# Altium PCB PCB.PcbDoc
Units mil, origin at the board's own origin, x right, y up, seen from the top; angles counter-clockwise.
Board outline 1335 x 530 mil, 2 copper layers (Top Layer, Bottom Layer); 33 components, 28 nets, 127 pads, 63 vias.
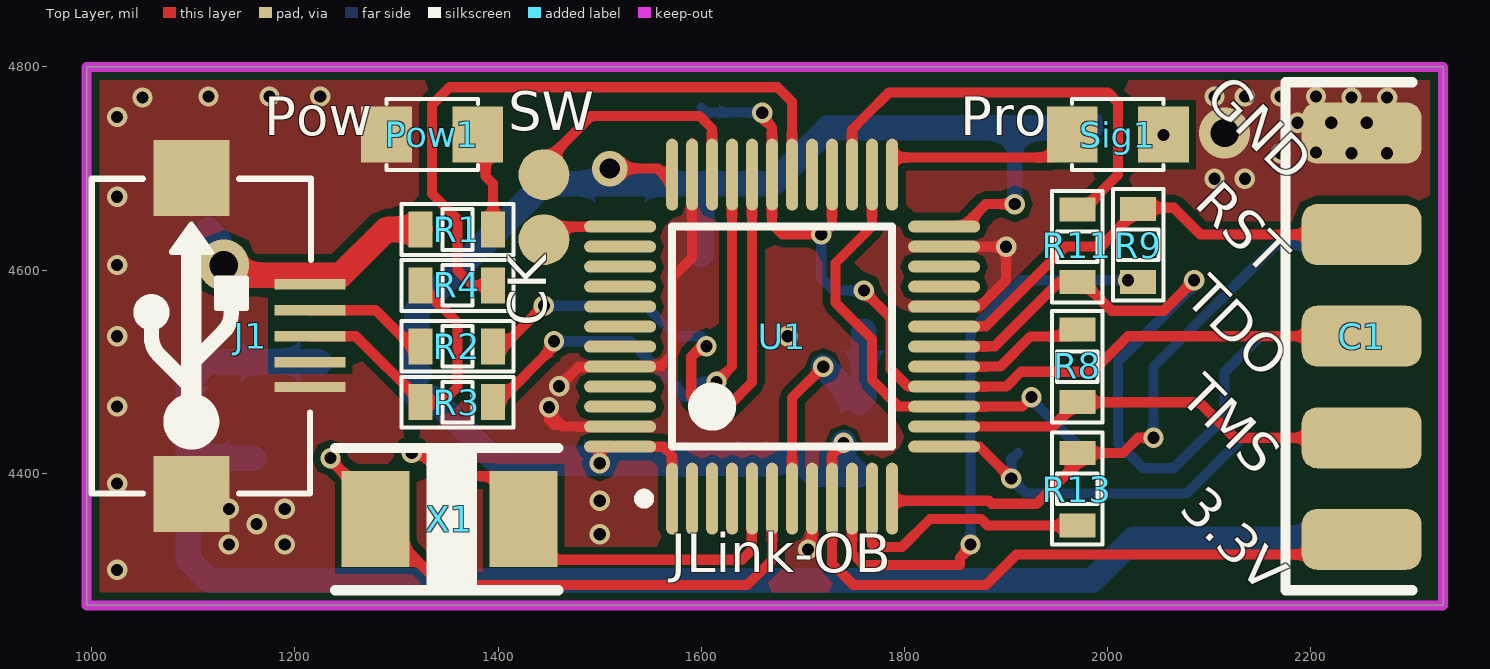
[diagram p0: Top Layer view]
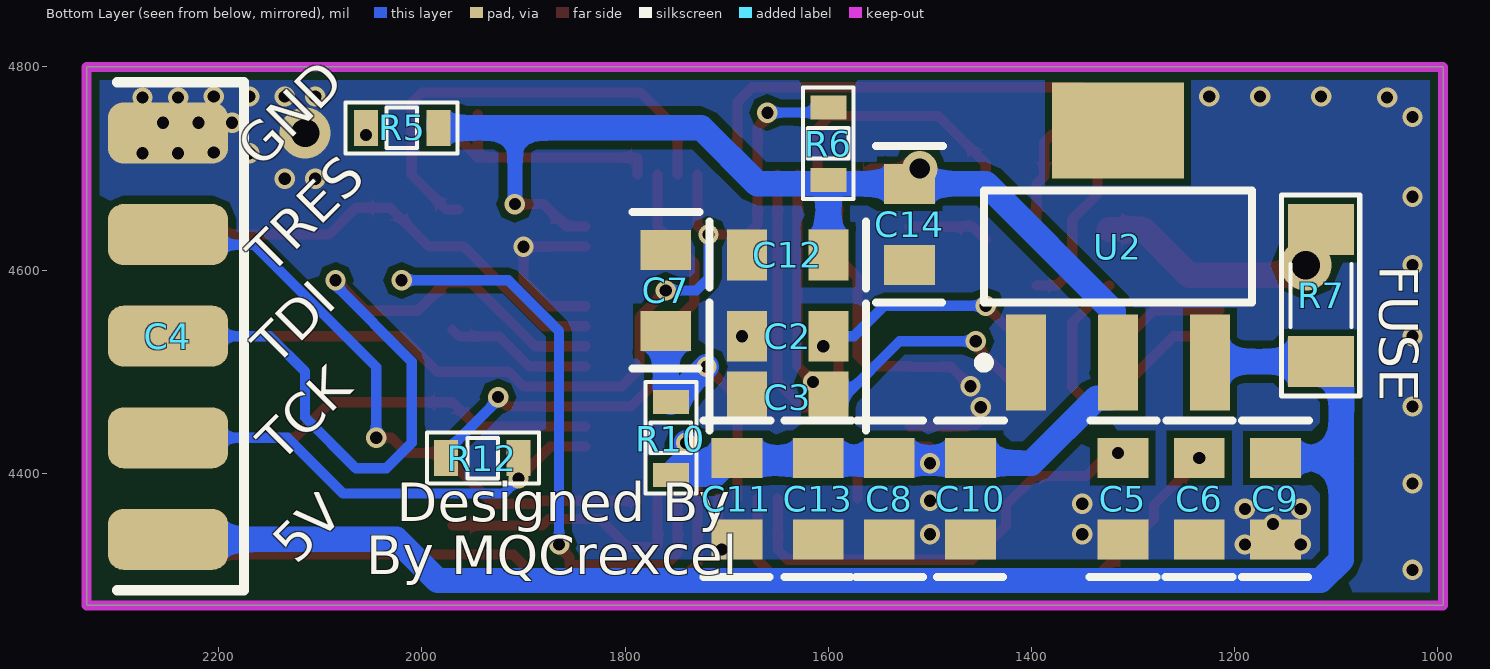
[diagram p1: Bottom Layer view, seen from below]
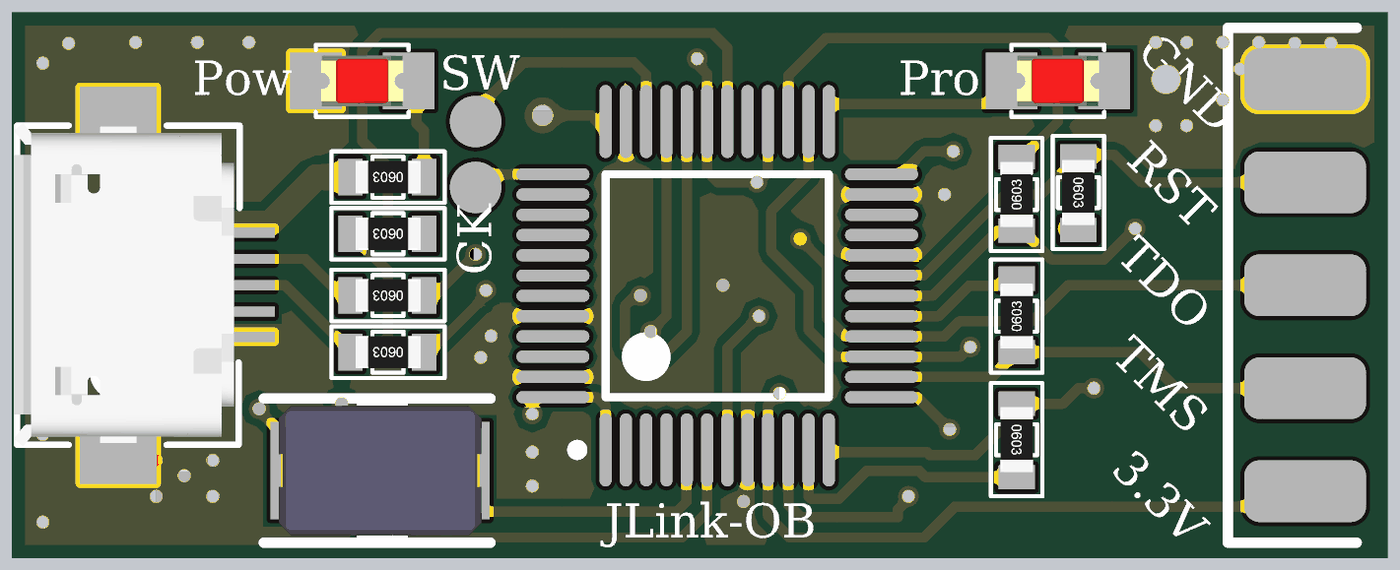
[diagram p2: 3D render of the assembled board from above, using the file's embedded part models]
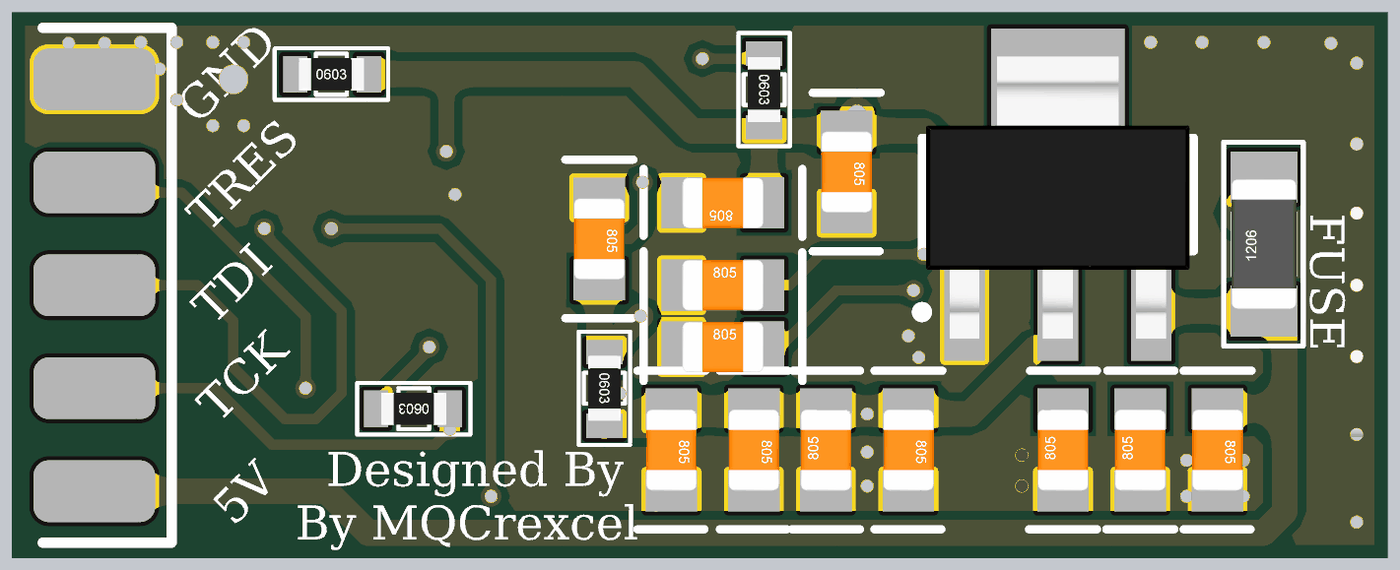
[diagram p3: 3D render of the assembled board from below, using the file's embedded part models]

## Layer stack, top to bottom
Top Solder: solder mask 0.4, Solder Resist, Dk 3.5
Top Layer: signal copper 1.4
Dielectric 1: dielectric 12.6, FR-4, Dk 4.8
Bottom Layer: signal copper 1.4
Bottom Solder: solder mask 0.4, Solder Resist, Dk 3.5

## Board outline
995,4270 995,4800 2330,4800 2330,4270

## Design rules (kind name [scope] priority, off if disabled: settings)
Clearance [All] p1: gap=7 ignorepadtopadclearanceinfootprint=FALSE except(0: Arc-Hole Track-Hole SMDPad-Hole THPad-Hole Via-Hole Fill-Hole Poly-Hole Region-Hole Text-Hole)
PolygonConnect [All] p1: connectstyle=Direct reliefconductorwidth=10 reliefentries=4 polygonreliefangle="90 Angle" airgapwidth=10
RoomDefinition Schematic [InComponentClass('Schematic')] p1: confinementstyle=ConfineIn formatcopy=TRUE lockcomponents=FALSE outline 0,0 2000,0 2000,1000 0,1000
RoutingVias [All] p1: holewidth=20 width=30 viastyle="Through Hole" minholewidth=0 minwidth=20 maxholewidth=28 maxwidth=50
SolderMaskExpansion [All] p1: expansion=4
Width [All] p1: maxlimit=25 minlimit=10 preferedwidth=15
30 further rules are at their usual default settings.

## Components (designator, comment, footprint, x,y, rotation, side; value= is the part's Value field where it differs from the comment)
C1 "Header5" "Header5 SMD" 2250,4535 r90 top
C2 "Capacitor Ceramic" C0805 1640,4535 r180 bottom value=33p
C3 "Capacitor Ceramic" C0805 1640,4475 r180 bottom value=33p
C4 "Header5" "Header5 SMD" 2250,4535 r270 bottom
C5 "Capacitor Ceramic" C0805 1310,4375 r90 bottom value=33p
C6 "Capacitor Ceramic" C0805 1235,4375 r90 bottom value=33p
C7 "Capacitor Ceramic" C0805 1760,4580 r270 bottom value=33p
C8 "Capacitor Ceramic" C0805 1540,4375 r90 bottom value=33p
C9 "Capacitor Ceramic" C0805 1160,4375 r270 bottom value=33p
C10 "Capacitor Ceramic" C0805 1460,4375 r270 bottom value=33p
C11 "Capacitor Ceramic" C0805 1690,4375 r270 bottom value=33p
C12 "Capacitor Ceramic" C0805 1640,4615 r0 bottom value=33p
C13 "Capacitor Ceramic" C0805 1610,4375 r270 bottom value=33p
C14 "Capacitor Ceramic" C0805 1520,4645 r270 bottom value=33p
J1 "USB-5" USB-M1 1215,4535 r90 top
Pow1 "LED" LED-0805-Red 1380,4733.43 r180 top value="LED 3 - 5 ly 2 Colour"
R1 "1K5" RES-SMD-0603 1360,4640 r180 top
R2 "22R" RES-SMD-0603 1360,4525 r180 top
R3 "22R" RES-SMD-0603 1360,4470 r180 top
R4 "1K5" RES-SMD-0603 1360,4585 r180 top
R5 "1K5" RES-SMD-0603 2020,4740 r180 bottom
R6 "1K5" RES-SMD-0603 1600,4725 r270 bottom
R7 "Res" RES-SMD-1206 1115,4575 r90 bottom
R8 "22R" RES-SMD-0603 1970,4505 r90 top
R9 "22R" RES-SMD-0603 2030,4625 r270 top
R10 "22R" RES-SMD-0603 1755,4435 r270 bottom
R11 "22R" RES-SMD-0603 1970,4623.11 r90 top
R12 "22R" RES-SMD-0603 1940,4415 r0 bottom
R13 "22R" RES-SMD-0603 1970,4385 r270 top
Sig1 "LED" LED-0805-Red 2055,4733.43 r180 top value="LED 3 - 5 ly 2 Colour"
U1 "STM32F103C8T6" LQFP48_N 1679.45,4534.53 r90 top
U2 "LM1117-3.3V" SOT223 1315,4623.11 r180 bottom
X1 "Crystal" Crystal 1279.41,4355 r0 top

## Footprints (in the part's own frame and the unit in brackets; to place one, negate y for a bottom-side part, rotate by r counter-clockwise, add the part's x,y. Pads: shape width x height; smd on the part's side, far side on the other; paste and mask are expansions set on the pad)
C0805 [mil] "Chip Resistor; Body 2.0 x 1.3 mm (LxW typ)"
  rect 39.37x50 smd: 1(-40,0) 2(40,0)
  silkscreen extent -77,-33 77,33, body extent -39,-25 39,25, height 31
Crystal [mm] "X"
  rect 1.7x2.4 smd: 1(0,0) 2(3.7,0)
  silkscreen extent -1.02,-1.78 4.57,1.78, body extent -11.43,-1.6 4.35,4.83, height 1.6
"Header5 SMD" [mil]
  rrect50% 60x118.11 smd: 1(-200,0) 2(-100,0) 3(0,0) 4(100,0) 5(200,0)
  silkscreen extent -250,-50 250,75
LED-0805-Red [mil]
  rect 50x55 smd: 1(0,0) 2(90,0)
  silkscreen extent 0,-35 90,35, body extent 5,-25 85,25, height 43
LQFP48_N [mm] "Thin QFP, 48-Leads, Body 7x7mm, Pitch 0.5mm, IPC Medium Density"
  oval 1.8x0.3 smd: 1(-4.05,2.75) 2(-4.05,2.25) 3(-4.05,1.75) 4(-4.05,1.25) 5(-4.05,0.75) 6(-4.05,0.25) 7(-4.05,-0.25) 8(-4.05,-0.75) 9(-4.05,-1.25) 10(-4.05,-1.75) 11(-4.05,-2.25) 12(-4.05,-2.75) 25(4.05,-2.75) 26(4.05,-2.25) 27(4.05,-1.75) 28(4.05,-1.25) 29(4.05,-0.75) 30(4.05,-0.25) 31(4.05,0.25) 32(4.05,0.75) 33(4.05,1.25) 34(4.05,1.75) 35(4.05,2.25) 36(4.05,2.75)
  oval 0.3x1.8 smd: 13(-2.75,-4.05) 14(-2.25,-4.05) 15(-1.75,-4.05) 16(-1.25,-4.05) 17(-0.75,-4.05) 18(-0.25,-4.05) 19(0.25,-4.05) 20(0.75,-4.05) 21(1.25,-4.05) 22(1.75,-4.05) 23(2.25,-4.05) 24(2.75,-4.05) 37(2.75,4.05) 38(2.25,4.05) 39(1.75,4.05) 40(1.25,4.05) 41(0.75,4.05) 42(0.25,4.05) 43(-0.25,4.05) 44(-0.75,4.05) 45(-1.25,4.05) 46(-1.75,4.05) 47(-2.25,4.05) 48(-2.75,4.05)
  silkscreen extent -4.17,-2.75 2.75,3.57, body extent -3.5,-3.5 3.5,3.5, height 1.6
RES-SMD-0603 [mm]
  rect 0.6x0.9 smd: 1(-0.889,0) 2(0.927,0)
  silkscreen extent -1.4,-0.64 1.4,0.64, body extent -0.8,-0.4 0.8,0.4, height 0.43
RES-SMD-1206 [mil]
  rect 50x65 smd: 1(-65,0) 2(65,0)
  silkscreen extent -99,-38 99,39, body extent -63,-31 63,32, height 40
SOT223 [mm]
  rect 1x2.4 smd: 1(-2.3,-2.9) 2(0,-2.9) 3(2.3,-2.9)
  rect 3.3x2.4 smd: 4(0,2.9)
  silkscreen extent -3.48,-3.02 3.35,1.4, body extent -3.25,-3.56 3.25,3.4, height 1.68
USB-M1 [mil]
  rect 10x70 smd: 1(51.18,0) 2(25.59,0) 3(0,0) 4(-25.59,0) 5(-50,0)
  rect 74.8x74.8 smd: 5(-155.51,116.84) 5(155.51,116.84)
  silkscreen extent -155,-1 155,215, body extent -157,5 158,218, height 107

## Part data
C1 C4: "Header IDC, 5 x 1 Pin Vertical 2.54mm Pitch (Non-Boxed, Male)", Manufacturer="Würth Elektronik eiSos GmbH", partNo=613002143121, ComponentLink1 Description=Manufacturer, ComponentLink1URL=http://www.we-online.com, ComponentLink2 Description=Datasheet, ComponentLink2URL=http://katalog.we-online.de/em/datasheet/6130xx143121.pdf, Created by="Karrer Zheng", Created Date="29 March 2013", NoPins=02
C2 C3 C5 C6 C7 C8 C9 C10 C11 C12 C13 C14: library part CapSMD, "Capacitor", LatestRevisionDate=17-Jul-2002, LatestRevisionNote="Re-released for DXP Platform.", PackageReference=RAD-0.3, Published=8-Jun-2000, Publisher="Altium Limited"
J1: Manufacturer=FCI, Manufacturer Part Number=10118193-0001LF, Supplier Part Number 1=609-4616-1-ND, .Checked PCB=RF, .Checked SCH=MM, .Creator=MM, Category="Connectors, Interconnects", ComponentLink1Description=http://portal.fciconnect.com/Comergent//fci/drawing/10118193.pdf, ComponentLink1URL=http://portal.fciconnect.com/Comergent//fci/drawing/10118193.pdf, Connector Type="USB - micro B", Features="Shielded, Solder Retention", Gender=Receptacle, Ingress Protection=-, Mounting Type="Surface Mount, Right Angle, Horizontal", Number of Contacts=5, Packaging="Cut Tape (CT)", Pricing 1="1=0.46, 10=0.433, 25=0.3712, 50=0.3156, 100=0.3032, 250=0.27224, 500=0.25988 (USD)", RoHS="RoHS Compliant", Specifications="USB 2.0", Stock 1=28642, Supplier 1=Digi-Key
Pow1 Sig1: library part "LED SMD"
R1 R2 R3 R4 R5 R6 R7 R8 R9 R10 R11 R12 R13: library part Res-SMD, "Resistor", Manufacturer="Generic Components", Class=Passive, Published=08/06/2000, Publisher="Altium Hobart Technology Centre"
U1: "STM32 ARM-based 32-bit MCU with 64 Kbytes Flash, 48-pin LQFP, Industrial Temperature", ComponentLink1Description="Manufacturer Link", ComponentLink1URL=www.st.com/stm32, ComponentLink2Description=Datasheet, ComponentLink2URL=http://www.st.com/stonline/products/literature/ds/13587.pdf, DatasheetVersion="rev6, Mar-2008", PackageDescription="48-Pin Low-Profile Quad Flat Pack, 7 x 7 mm Body, 0.5 mm Pitch (LQFP48)", PackageReference=LQFP48, PackageVersion=Mar-2008, Published=30-May-2008, Publisher="Altium Limited"
U2: library part LM1117, "800mA Low-Dropout Linear Regulator", Creator="Nguyen Ba Bien", Website=http://group3i.net

## Free pads (board coordinates)
  round 50 smd: 2(1445,4630) 2(1445,4693.98)

## Via types
v1: diameter 20, hole 12, Top Layer to Bottom Layer, tented both sides, 60 vias
v2: diameter 50, hole 28, Top Layer to Bottom Layer, tented both sides, 2 vias
v3: diameter 35, hole 20, Top Layer to Bottom Layer, tented both sides, 1 vias

## Nets (pads, with @x,y where several pads share a name; then routed paths per layer and width w, separated by ;. In a path a pad name is that pad's centre, name@x,y a point inside that pad or via, vN(x,y) a via of type N, cw(c..) or ccw(c..) an arc to the next point about the centre after c; other vN are vias at no path point)
3.3V: C1.1 C8.2 C10.1 C11.1 C12.1 C13.1 C14.1 R5.2 R6.2 R10.2 U1.1 U1.9 U1.24 U1.36 U1.48 U2.2 | length 2732.2
  Top Layer w10: v1(1500,4410) 1500,4425.42 1500.84,4426.26 U1.48 1562.47,4426.26 1571.18,4417.55 U1.1 ; v3(1510,4700) 1557.2,4700 1567.2,4690 U1.36 ; v1(1740,4430) 1728.66,4418.66 U1.9 1728.66,4311.34 1750,4290 1880,4290 1910,4320 2195,4320 2210,4335 C1.1 ; U1.24 1857.8,4642.8 1880,4665 v1(1908.51,4665)
  Bottom Layer w15: v1(1908.51,4665) 1908.51,4740.01 1908.51,4742.5
  Bottom Layer w25: U2.2@1314.45,4490 U2.2@1315,4490.55 ; U2.2 U2.2@1315,4505.83 ; U2.2@1320.55,4495.83 U2.2@1320.55,4500.28 ; U2.2@1322.18,4498.64 U2.2@1320.55,4500.28 ; C10.1 C8.2 C13.1 C11.1 1695.32,4415 C11.1@1700.32,4410 ; C12.1 R6.2@1600,4680 ; C11.1@1675,4410 v1(1500,4410) 1400,4410 1335.81,4474.19 1322.18,4474.19 1315,4481.38 U2.2@1315,4490.55 ; C11.1@1690,4410 C11.1@1700.32,4410 ; v1(1740,4430) 1740,4413.5 R10.2@1743.5,4410 ; R10.2 R10.2@1754.31,4399.2 ; R5.2@1983.51,4744.54 R5.2 1908.51,4740.01 1725.01,4740.01 1670,4685 C14.1 1445,4685 1319.74,4559.74 U2.2@1319.74,4501.08 ; U2.2@1315,4490.55 U2.2@1315,4505.83 ; U2.2@1315,4490.55 1319.74,4495.3 U2.2@1319.74,4501.08 ; U2.2@1315,4505.83 U2.2@1319.74,4501.08 ; U2.2@1319.74,4501.08 U2.2@1320.55,4500.28 ; C11.1@1700.32,4410 R10.2@1743.5,4410 ; C11.1@1700.32,4410 1711.12,4399.2 R10.2@1754.31,4399.2 ; R10.2@1743.5,4410 R10.2@1754.31,4399.2
5Vin: J1.1 R1.2 R7.2 | length 257.5
  Top Layer w25: v2(1130,4605) 1140,4595 1245,4595 1290,4640 R1.2
  Bottom Layer w25: R7.2 1125.22,4629.78 1125.22,4609.78 v2(1130,4605)
+5: C4.5 C9.1 R7.1 U2.3 | length 1591.1
  Bottom Layer w25: C9.1 1095,4415 ; U2.3 1223.39,4510 R7.1 ; C4.5 2025,4335 1984.5,4294.5 1115.5,4294.5 1095,4315 1095,4415 ; 1095,4415 R7.1@1095,4490 ; R7.1@1095,4490 R7.1 ; R7.1@1095,4490 1095,4497.5 1107.5,4510 R7.1
GND: C1.5 C2.1 C3.1 C4.1 C5.1 C6.1 C7.1 C8.1 C9.2 C10.2 C11.2 C12.2 C13.2 C14.2 J1.5 Pow1.2 U1.8 U1.20 U1.23 U1.35 U1.44 U1.47 U2.1 | length 634.8
  Top Layer w10: v1(1460,4485.77) 1478.88,4504.65 1519.65,4504.65 U1.44 1520.35,4505.35 1560.35,4505.35 1571.18,4516.18 1571.18,4592.66 1590.87,4612.35 U1.35 ; U1.47 1463.67,4445.94 1461.89,4447.72 ; v1(1705,4325) 1705,4327.71 1708.63,4331.34 1708.63,4374.73 U1.8 ; U1.20 1839.24,4564.4 1874.41,4564.4 1899.96,4589.96 v1(1899.96,4623.11) U1.23 ; 1461.89,4447.72 1450,4459.61 v1(1450,4465) 1450,4452.72 1455,4447.72 1461.89,4447.72
  other v1: 1025,4305 1135,4330 1190,4330 1350,4340 1500,4340 1162.29,4350 1135,4365 1190,4365 1350,4370 1500,4373 1025,4390 1025,4465.79 1025,4535 1685,4535 1025,4605 1025,4672.29 2105,4690 2135,4690 2170,4715 2240,4715 2275,4715 2205,4715.93 2186.81,4745 2220,4745 2255,4745 1025,4750.68 1050,4770 2240,4770 2275,4770 1115,4770.93 1175,4770.93 1225,4770.93 2105,4770.93 2135,4770.93 2170,4770.93 2205,4770.93
  other v2: 2115,4735
NetC5_2: C5.2 U1.5 X1.2 | length 444.6
  Top Layer w10: v1(1315,4420) 1323.52,4420 1346.27,4397.24 1396.61,4397.24 1425.08,4368.78 X1.2 1425.08,4348.46 1458.54,4315 1640,4315 1649.57,4324.57 1649.57,4374.73 U1.5
NetC6_2: C6.2 U1.6 X1.1 | length 573.3
  Top Layer w10: v1(1235,4415) 1235,4413.19 1279.41,4368.78 X1.1 1344.41,4290 1645,4290 1669.61,4314.61 U1.6
  Bottom Layer w10: v1(1235,4415) C6.2@1240,4410
NetC7_2: C7.2 R10.1 U1.7 | length 264.2
  Top Layer w10: U1.7 1689.29,4474.29 v1(1720,4505)
  Bottom Layer w25: v1(1720,4505) R10.1 1760,4475 C7.2
NetJ1_2: J1.2 R2.2 | length 123.3
  Top Layer w10: J1.2 1279.41,4560.59 1315,4525 R2.2
NetJ1_3: J1.3 R3.2 R4.2 | length 294.1
  Top Layer w10: J1.3 1260,4535 1323.51,4471.49 R3.2 1345,4470 1360,4485 1360,4548.51 R4.2
NetPow1_1: Pow1.1 R1.1 | length 99.6
  Top Layer w10: Pow1.1 1387.5,4725.92 1387.5,4692.5 1395,4685 R1.1
NetR5_1: R5.1 Sig1.1 | length 0.4
  Top Layer w10: v1(2055,4733.03) Sig1.1
NetSig1_2: Sig1.2 U1.25 | length 244.5
  Top Layer w10: U1.25 1787.72,4710.09 1788.55,4710.93 1945,4710.93 1965,4730.93 Sig1.2 ; Sig1.2@1945,4713.03 Sig1.2@1945,4753.03
"SWCLK In": pad.2@1445,4630 U1.37 | length 80.3
  Top Layer w10: pad.2@1445,4630 1457.8,4642.8 U1.37
"SWDIO In": pad.2@1445,4693.98 U1.34 | length 253.5
  Top Layer w10: pad.2@1445,4693.98 1445,4705 1490.68,4750.68 ; U1.34 1610.55,4739.45 1598.35,4751.65 1497.7,4751.65 ; 1490.68,4750.68 1497.7,4751.65 ; 1490.68,4750.68 1491.65,4751.65 1497.7,4751.65
TCK_I: C4.4 R12.1 U1.13 | length 500.9
  Top Layer w10: U1.13 1873.74,4426.26 v1(1905,4395)
  Bottom Layer w10: R12.1 v1(1905,4395) ; R12.1@1911.82,4420 1905,4413.19 v1(1905,4395) ; C4.4 2132.5,4435 2077.5,4380 1920,4380 v1(1905,4395)
TCK_O: R12.2 U1.15 U1.26 | length 484.9
  Top Layer w10: U1.26 1768.03,4643.03 1732,4607 1732,4568 1768.03,4531.97 1768.03,4491.97 1794.37,4465.63 U1.15 1915.63,4465.63 v1(1925,4475)
  Bottom Layer w10: v1(1925,4475) 1925,4472.38 1976.49,4420.9 R12.2
TDI_I: C4.3 R11.1 U1.18 | length 863.9
  Top Layer w10: 1884.68,4524.69 U1.18 1839.24,4525.03 1888.77,4525.03 1951.84,4588.11 R11.1 1975.9,4588.11 2004.01,4560 2055,4560 v1(2085,4590)
  Bottom Layer w10: v1(2085,4590) 2085,4585 2010,4510 2010,4430 2035,4405 2065,4405 2115,4455 2115,4500 2150,4535 C4.3
TDI_O: R11.2 U1.27 | length 456.7
  Top Layer w10: U1.27 1748.35,4738.35 1761.65,4751.65 1785,4775 2000,4775 2010,4765 2010,4693.7 1975.9,4659.6 R11.2 R11.2@1964.09,4659.6
TDO_I: C1.3 R6.1 U1.16 U1.28 U1.31 | length 969.6
  Top Layer w10: v1(1660,4755) 1655,4755 1669.61,4740.39 U1.31 1669.61,4645.39 1680,4635 v1(1718,4635) 1720,4635 1728.66,4643.66 U1.28 ; v1(1760,4580) 1760,4579.54 1786.03,4553.51 1786.03,4503.02 1803.73,4485.31 1899.96,4485.31 1914.65,4500 1985,4500 2020,4535 C1.3
  Bottom Layer w10: R6.1 1605,4755 v1(1660,4755) ; v1(1718,4635) 1718,4592 1730,4580 v1(1760,4580)
TMS_I: C1.2 R8.1 U1.14 | length 435.6
  Top Layer w10: U1.14 1945.95,4445.94 R8.1 2090,4470 2125,4435 C1.2
TMS_O: R8.2 U1.17 | length 146.2
  Top Layer w10: U1.17 1894.19,4505 1923.88,4534.69 1963.2,4534.69 R8.2
TRES_I: C4.2 R13.1 U1.12 | length 621.5
  Top Layer w10: U1.12 1787.72,4373.84 1788.55,4373 1882.81,4373 1885.81,4370 1930,4370 1970,4410 R13.1 2015,4420 2030,4435 v1(2045,4435)
  Bottom Layer w10: v1(2045,4435) 2045,4504.64 2165.36,4625 2240,4625 C4.2
TRES_O: R13.2 U1.11 | length 262
  Top Layer w10: U1.11 1768.03,4330.13 1770.51,4327.65 1797.65,4327.65 1825,4355 1875.36,4355 1881.84,4348.51 R13.2
TRST_I: C1.4 R9.1 U1.19 | length 506.1
  Top Layer w10: 1874.37,4544.37 U1.19 1839.24,4544.72 1880.18,4544.72 1919.34,4583.88 1919.34,4583.95 1958.5,4623.11 1993.11,4623.11 R9.1 2031.49,4661.49 2065,4661.49 2091.49,4635 C1.4
TRST_O: R9.2 U1.10 | length 575.1
  Top Layer w10: U1.10 1748.35,4321.65 1760.35,4309.65 1854.65,4309.65 1854.65,4316.94 1865,4327.29 v1(1865,4330)
  Bottom Layer w10: v1(1865,4330) 1865,4540 1915,4590 v1(2020,4590)
UD+: C3.2 R3.1 U1.33 | length 487.1
  Top Layer w10: R3.1 1400,4470 1455,4525 v1(1455,4530) ; v1(1615,4490) 1630.24,4505.24 U1.33
  Bottom Layer w10: v1(1455,4530) 1530,4530 1585,4475 1600,4490 v1(1615,4490)
UD+UP: R4.1 U1.30 | length 653.5
  Top Layer w10: R4.1 1375,4585 1360,4600 1360,4650.01 1335,4675.01 1335,4762.96 1352.04,4780 1675,4780 1689.29,4765.71 U1.30
UD-: C2.2 R2.1 U1.32 | length 583.9
  Top Layer w10: R2.1 1405,4525 v1(1445,4565) ; v1(1605,4525) 1600,4525 1590,4515 1590,4475 1600,4465 1625.36,4465 1649.92,4489.57 U1.32
  Bottom Layer w10: v1(1445,4565) 1545,4565 1575,4535 C2.2 1605,4530 v1(1605,4525)
pads on no net: J1.4 U1.2 U1.3 U1.4 U1.21 U1.22 U1.29 U1.38 U1.39 U1.40 U1.41 U1.42 U1.43 U1.45 U1.46 U2.4

## Polygon pours and split planes (outlines as drawn)
GND on Top Layer "GND_L01_P010" (solid, remove dead copper, pour order 10): 960,4830 960,4235 2365,4235 2365,4830
GND on Bottom Layer "GND_L02_P012" (solid, remove dead copper, pour order 12): 955,4845 955,4235 2375,4235 2375,4835 2370,4835

## Keep-outs
Keep-Out Layer:
  the board outline again, w10

## Silkscreen, mask and mechanical layers (free items; w line width, h text height)
Top Overlay:
  text "GND" at 2085,4760 h65 r315
  text "SW" at 1410,4725 h65
  text "Pow" at 1170,4720 h65
  text "Pro" at 1855,4720 h65
  text "RST" at 2075,4655 h65 r315
  text "TDO" at 2065,4562.5 h65 r315
  text "CK" at 1460,4545 h65 r90
  text "TMS" at 2060,4465 h65 r315
  text "3.3V" at 2060,4355 h65 r315
  text "JLink-OB" at 1570,4290 h65
Bottom Overlay:
  text "GND" at 2150,4690 h65 r315
  text "FUSE" at 1070,4605 h65 r90
  text "TRES" at 2140,4585 h65 r315
  text "TDI" at 2135,4495 h65 r315
  text "TCK" at 2130,4400 h65 r315
  text "Designed By" at 2025,4340 h65
  text "5V" at 2115,4300 h65 r315
  text "By MQCrexcel" at 2055,4288 h65